# EAGLE board COSEQ_shield2 (EAGLE 6.5.0)
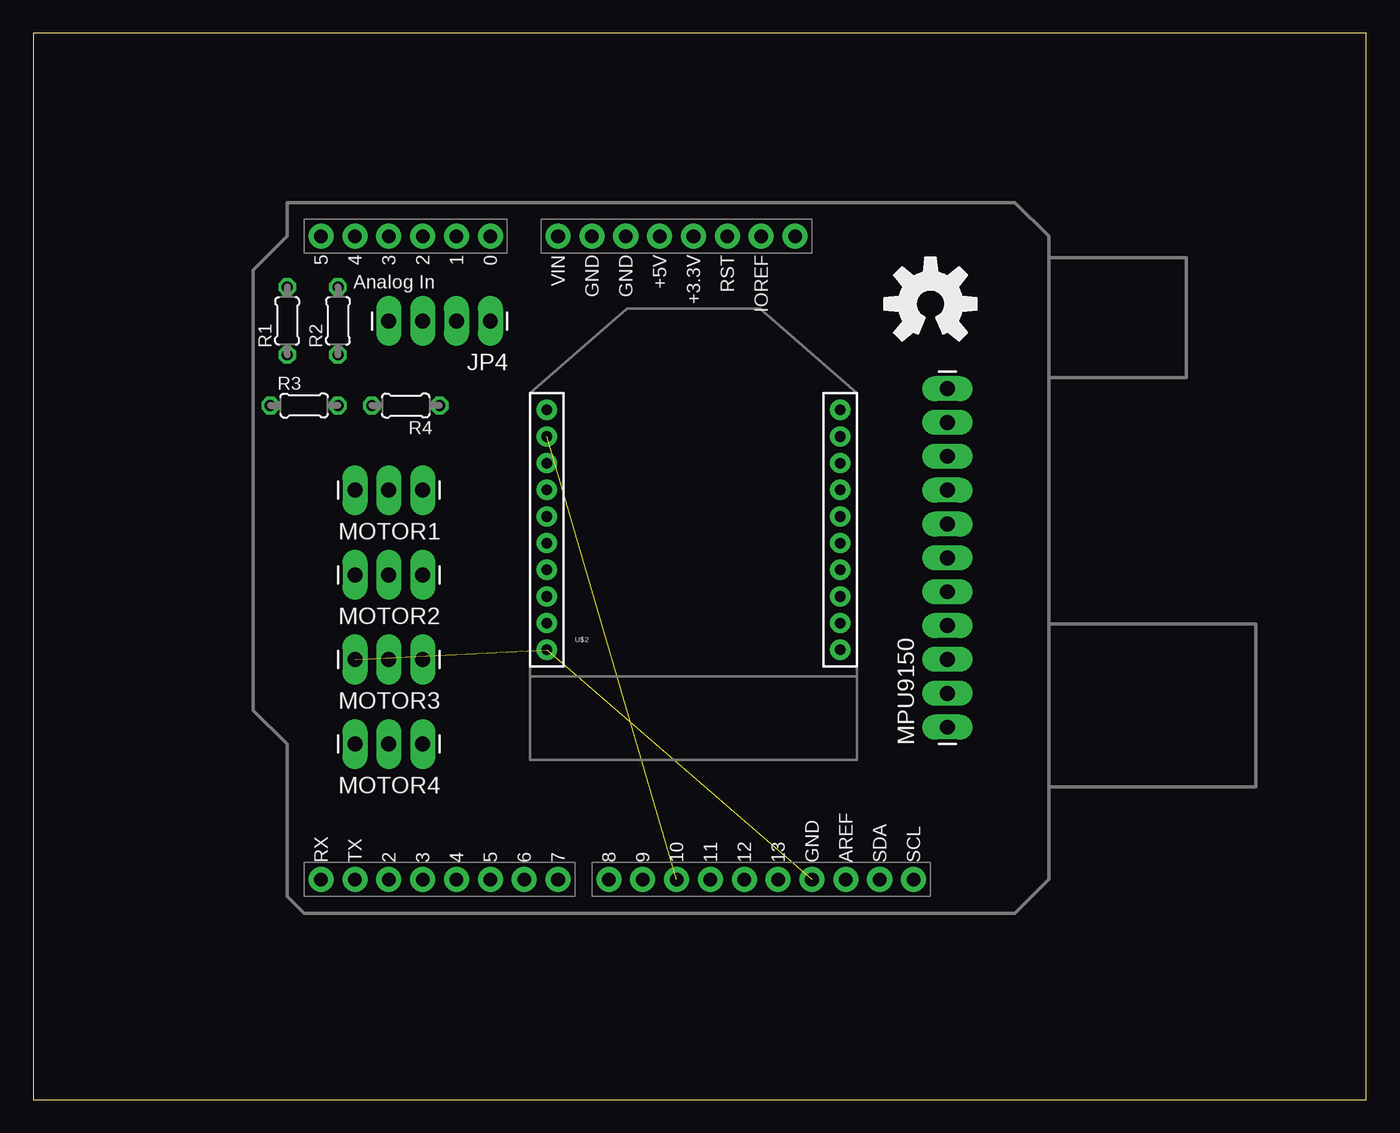
[diagram p0: board, top side]
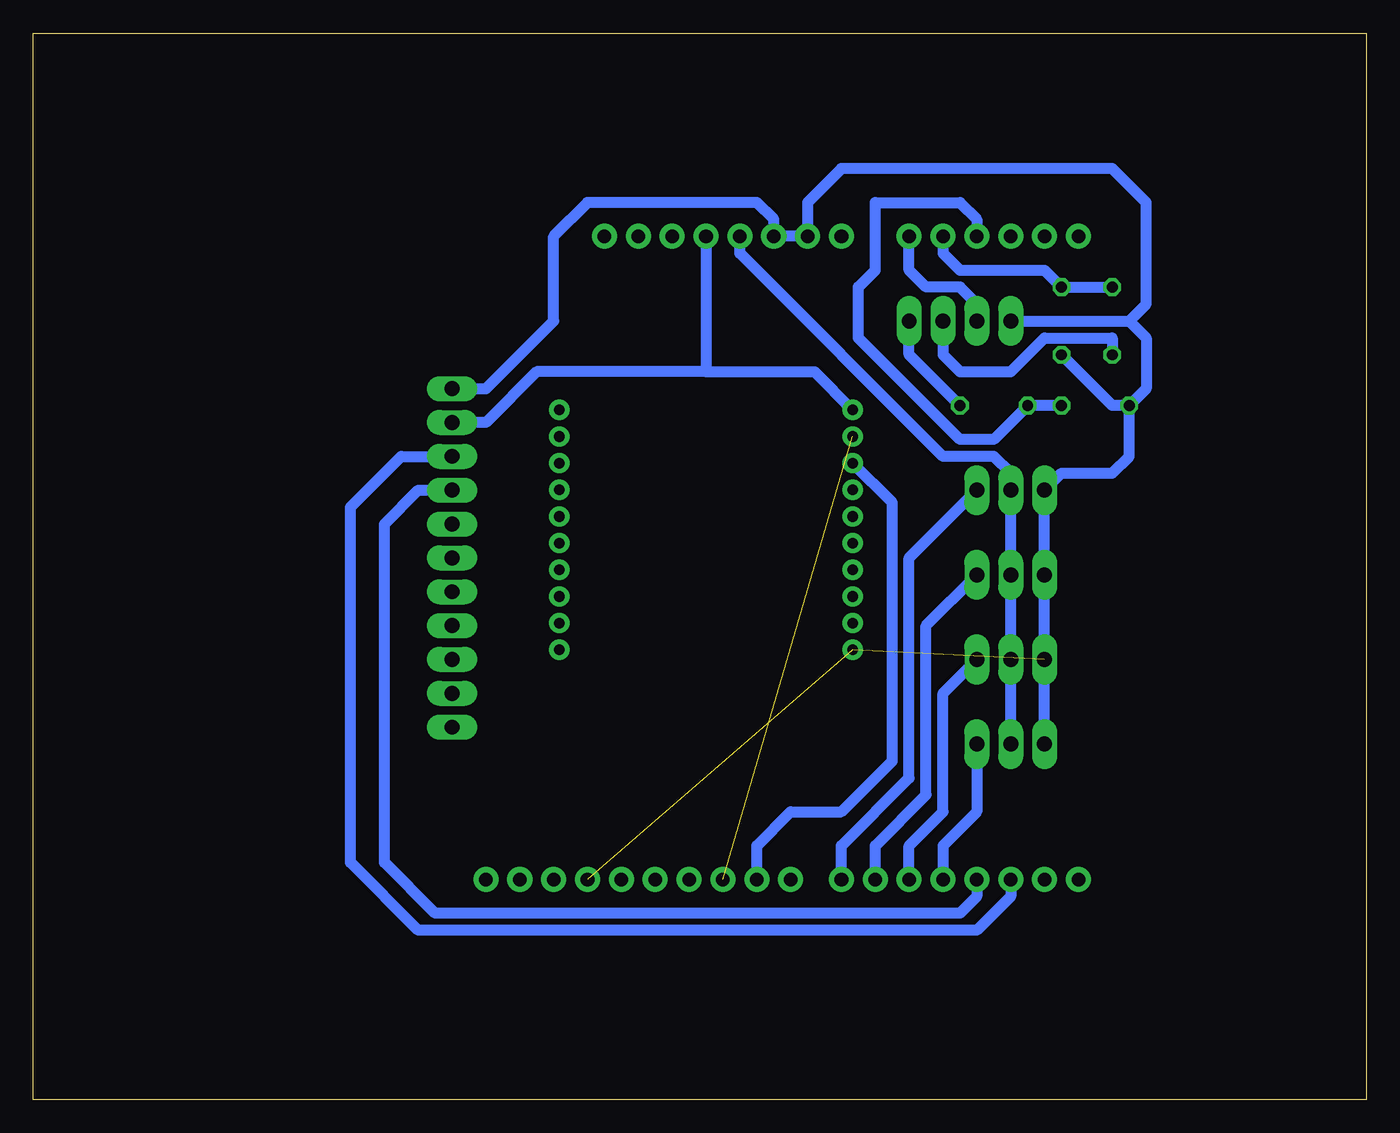
[diagram p1: board, bottom side, seen from below]

Size 100 x 80 mm. Coordinates in mm from the lower left corner, seen from the top.
Outline: 0,0 100,0 100,80 0,80 0,0
Copper layers (1*16): Top 0.035mm / dielectric 1.5mm / Bottom 0.035mm
Design rules "default": minimum track width 10mil, minimum drill 24mil, track to track 8mil, track to pad 8mil, pad to pad 8mil, via to via 8mil, smd to smd 8mil, copper to edge 40mil, drill to drill 8mil, minimum pad ring 10mil, minimum via ring 8mil, stop-mask expansion 4mil, vias tented up to drill 0mil, thermal gap 10mil

## Footprints (pad centres in the part's own frame; a part is rotated, then mirrored left to right if it is on the bottom)
1X04_LONGPADS = drill 1.118 pad 1.88 long: 1 0,0; 2 2.54,0; 3 5.08,0; 4 7.62,0
1X03_LONGPADS = drill 1.118 pad 1.88 long: 1 0,0; 2 2.54,0; 3 5.08,0
1X11_LONGPADS = drill 1.118 pad 1.88 long: 1 0,0; 2 2.54,0; 3 5.08,0; 4 7.62,0; 5 10.16,0; 6 12.7,0; 7 15.24,0; 8 17.78,0; 9 20.32,0; 10 22.86,0; 11 25.4,0
RESISTOR = drill 0.813 octagon: 1 -2.54,0; 2 2.54,0
UNO_R3_SHIELD = drill 1.016 pad 1.88: 3.3V 50.8,26.67; 5V 50.8,29.21; A0 50.8,41.91; A1 50.8,44.45; A2 50.8,46.99; A3 50.8,49.53; A4 50.8,52.07; A5 50.8,54.61; AREF 2.54,15.24; D2 2.54,49.53; D3 2.54,46.99; D4 2.54,44.45; D5 2.54,41.91; D6 2.54,39.37; D7 2.54,36.83; D8 2.54,33.02; D9 2.54,30.48; D10 2.54,27.94; D11 2.54,25.4; D12 2.54,22.86; D13 2.54,20.32; GND@0 50.8,31.75; GND@1 50.8,34.29; GND@2 2.54,17.78; IOREF 50.8,21.59; NC 50.8,19.05; RES 50.8,24.13; RX 2.54,54.61; SCL 2.54,10.16; SDA 2.54,12.7; TX 2.54,52.07; VIN 50.8,36.83
XBEE-1 = drill 0.8 pad 1.524: 1 -11,20; 2 -11,18; 3 -11,16; 4 -11,14; 5 -11,12; 6 -11,10; 7 -11,8; 8 -11,6; 9 -11,4; 10 -11,2; 11 11,2; 12 11,4; 13 11,6; 14 11,8; 15 11,10; 16 11,12; 17 11,14; 18 11,16; 19 11,18; 20 11,20

## Placement (x,y rotation side)
JP4  [1X04_LONGPADS]  34.29,58.42 180 top
LOGO1  OSHW-LOGOL  [OSHW-LOGO-L]  67.31,59.69 0 top
MOTOR1  [1X03_LONGPADS]  29.21,45.72 180 top
MOTOR2  [1X03_LONGPADS]  29.21,39.37 180 top
MOTOR3  [1X03_LONGPADS]  29.21,33.02 180 top
MOTOR4  [1X03_LONGPADS]  29.21,26.67 180 top
MPU9150  M11LONGPADS  [1X11_LONGPADS]  68.58,27.94 90 top
R1  1K  [RESISTOR]  19.05,58.42 90 top
R2  1K  [RESISTOR]  22.86,58.42 90 top
R3  1K  [RESISTOR]  20.32,52.07 0 top
R4  2K  [RESISTOR]  27.94,52.07 180 top
U$1  ARDUINO_R3_SHIELD  [UNO_R3_SHIELD]  76.2,13.97 90 top
U$2  XBEE-1B1  [XBEE-1]  49.53,31.75 0 top

## Library data of the parts
JP4 MOTOR1-MOTOR4 MPU9150 = SparkFun-Connectors
LOGO1 = SparkFun-Aesthetics
R1-R4 = RBBB
U$1 = SparkFun-Boards
U$2 = SparkFun-RF

## Nets
3.3V: MPU9150.10 U$1.3.3V U$2.1
5V: MOTOR1.2 MOTOR2.2 MOTOR3.2 MOTOR4.2 U$1.5V
AD0: MPU9150.3
CELL1: JP4.3 U$1.A0
CIN: MPU9150.4
CLK: U$1.D13
COUT: MPU9150.5
CS: U$1.D8
D0: U$1.D12
D1: U$1.D11
ESC: MPU9150.6
ESD: MPU9150.7
FSYNC: MPU9150.2
GND: JP4.4 MOTOR1.3 MOTOR2.3 MOTOR3.3 MOTOR4.3 MPU9150.11 R2.1 R3.1 U$1.GND@0 U$1.GND@1 U$1.GND@2 U$2.10
INT: MPU9150.1
M1: MOTOR4.1 U$1.D4
M2: MOTOR3.1 U$1.D5
M3: MOTOR2.1 U$1.D6
M4: MOTOR1.1 U$1.D7
N$1: JP4.2 R1.1
N$2: U$1.D10 U$2.2
N$3: U$1.D9 U$2.3
N$4: R1.2 R2.2 U$1.A1
N$6: JP4.1 R4.1
N$7: R3.2 R4.2 U$1.A2
SCL: MPU9150.8 U$1.D3
SDA: MPU9150.9 U$1.D2

## Tracks (layer width: path | path; a pad name or v marks a point on that pad's centre or on a via)
3.3V
  Bottom 0.813: U$1.3.3V 49.53,54.61 | 49.53,54.61 41.39,54.61 U$2.1 | 49.53,54.61 62.23,54.61 66.04,50.8 MPU9150.10
5V
  Bottom 0.813: MOTOR4.2 MOTOR3.2 MOTOR2.2 MOTOR1.2 26.67,46.99 27.94,48.26 31.75,48.26 46.99,63.5 U$1.5V
CELL1
  Bottom 0.813: JP4.3 29.21,59.69 30.48,60.96 33.02,60.96 34.29,62.23 U$1.A0
GND  (2 unrouted)
  Bottom 0.813: MOTOR4.3 MOTOR3.3 MOTOR2.3 MOTOR1.3 22.86,46.99 19.05,46.99 17.78,48.26 R3.1 | R3.1 19.05,52.07 R2.1 | 17.78,58.42 16.51,57.15 16.51,53.34 R3.1 | JP4.4 17.78,58.42 | 17.78,58.42 16.51,59.69 16.51,67.31 19.05,69.85 39.37,69.85 41.91,67.31 U$1.GND@1 U$1.GND@0 44.45,66.04 45.72,67.31 58.42,67.31 60.96,64.77 60.96,58.42 66.04,53.34 MPU9150.11
M1
  Bottom 0.813: MOTOR4.1 29.21,21.59 31.75,19.05 U$1.D4
M2
  Bottom 0.813: U$1.D5 34.29,19.05 31.75,21.59 31.75,30.48 MOTOR3.1
M3
  Bottom 0.813: U$1.D6 36.83,19.05 33.02,22.86 33.02,35.56 MOTOR2.1
M4
  Bottom 0.813: U$1.D7 39.37,19.05 34.29,24.13 34.29,40.64 MOTOR1.1
N$1
  Bottom 0.813: JP4.2 31.75,55.88 30.48,54.61 26.67,54.61 24.13,57.15 19.05,57.15 R1.1
N$2  (1 unrouted)
N$3
  Bottom 0.813: U$1.D9 45.72,19.05 43.18,21.59 39.37,21.59 35.56,25.4 35.56,44.78 U$2.3
N$4
  Bottom 0.813: U$1.A1 31.75,63.5 30.48,62.23 24.13,62.23 R2.2 R1.2
N$6
  Bottom 0.813: R4.1 34.29,55.88 JP4.1
N$7
  Bottom 0.813: R3.2 R4.2 27.94,49.53 30.48,49.53 38.1,57.15 38.1,60.96 36.83,62.23 36.83,67.31 30.48,67.31 29.21,66.04 U$1.A2
SCL
  Bottom 0.813: U$1.D3 29.21,15.24 30.48,13.97 69.85,13.97 73.66,17.78 73.66,43.18 71.12,45.72 MPU9150.8
SDA
  Bottom 0.813: U$1.D2 26.67,15.24 29.21,12.7 71.12,12.7 76.2,17.78 76.2,44.45 72.39,48.26 MPU9150.9